# Altium PCB ESC.PcbDoc (part 1 of 3)
Units mm, origin at the board's own origin, x right, y up, seen from the top; angles counter-clockwise.
Board outline 85 x 45 mm, 4 copper layers (L1-SIGNAL/PWR, L2-PWR, L3-GND, L4-SIGNAL/PWR), stack 1.571 mm thick; 139 components, 88 nets, 499 pads, 911 vias.
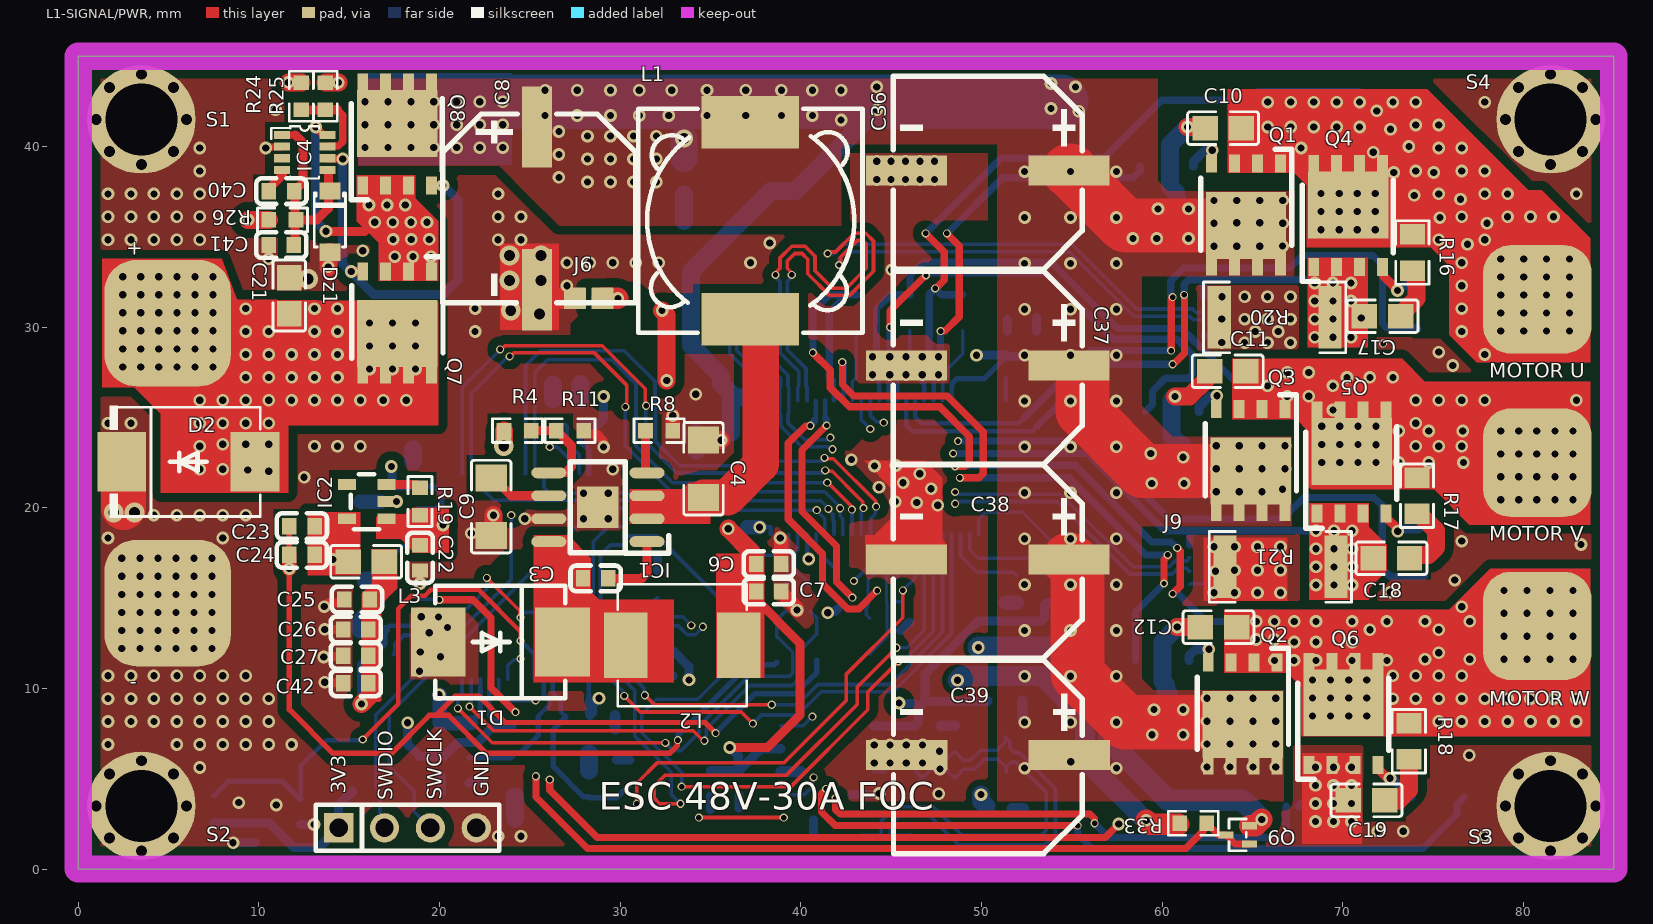
[diagram p0: L1-SIGNAL/PWR view]
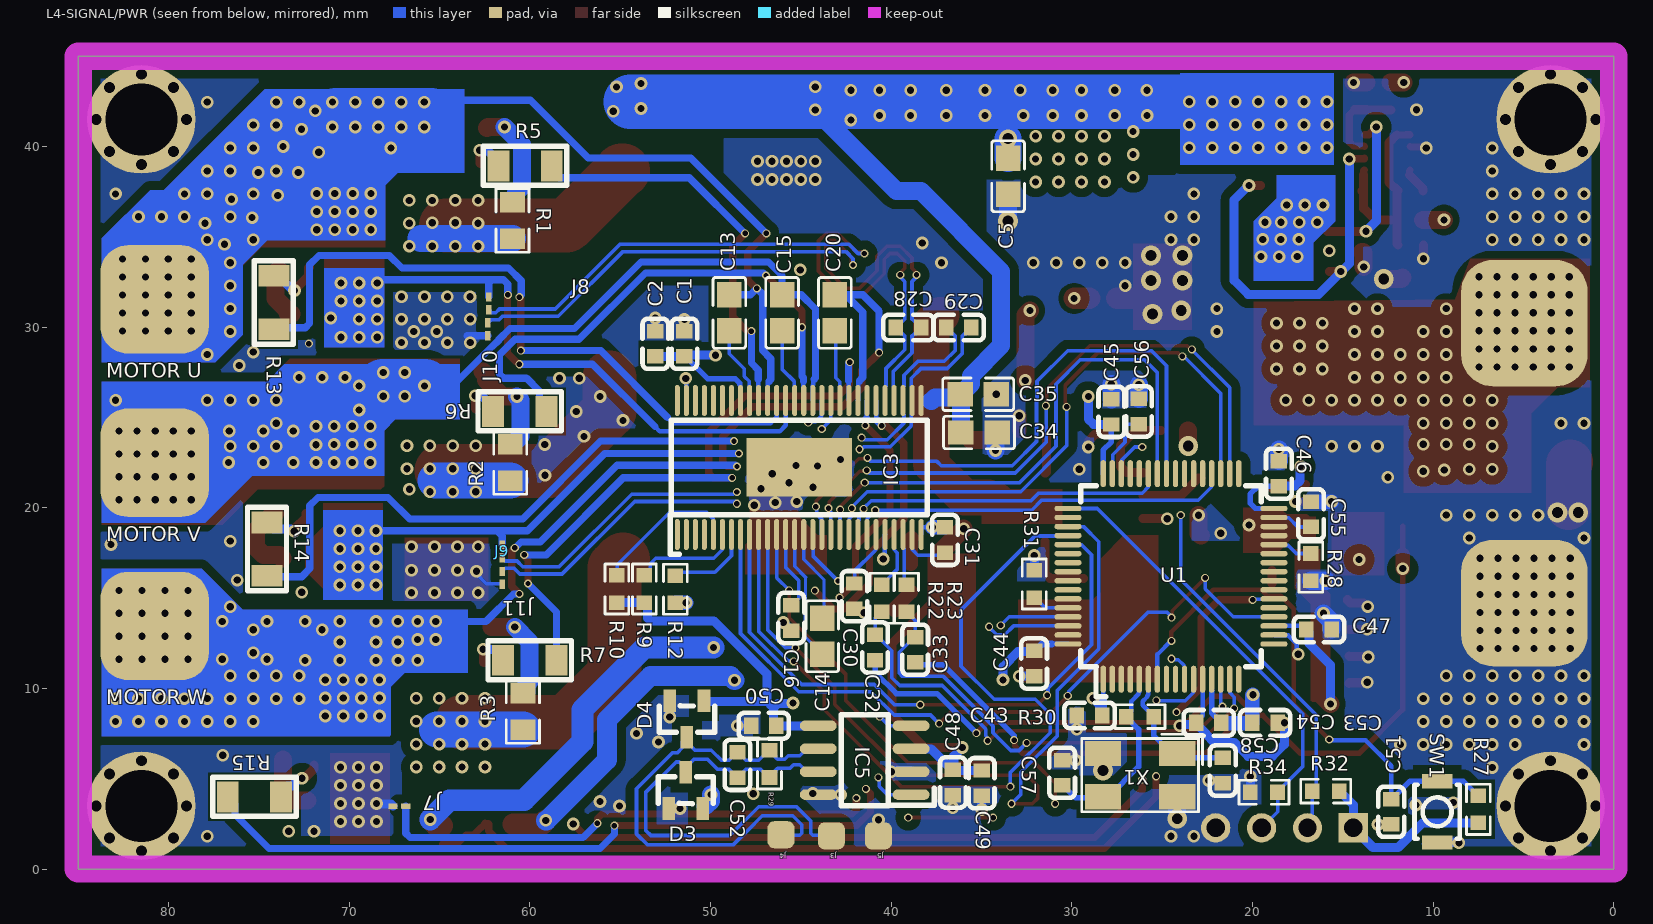
[diagram p1: L4-SIGNAL/PWR view, seen from below]
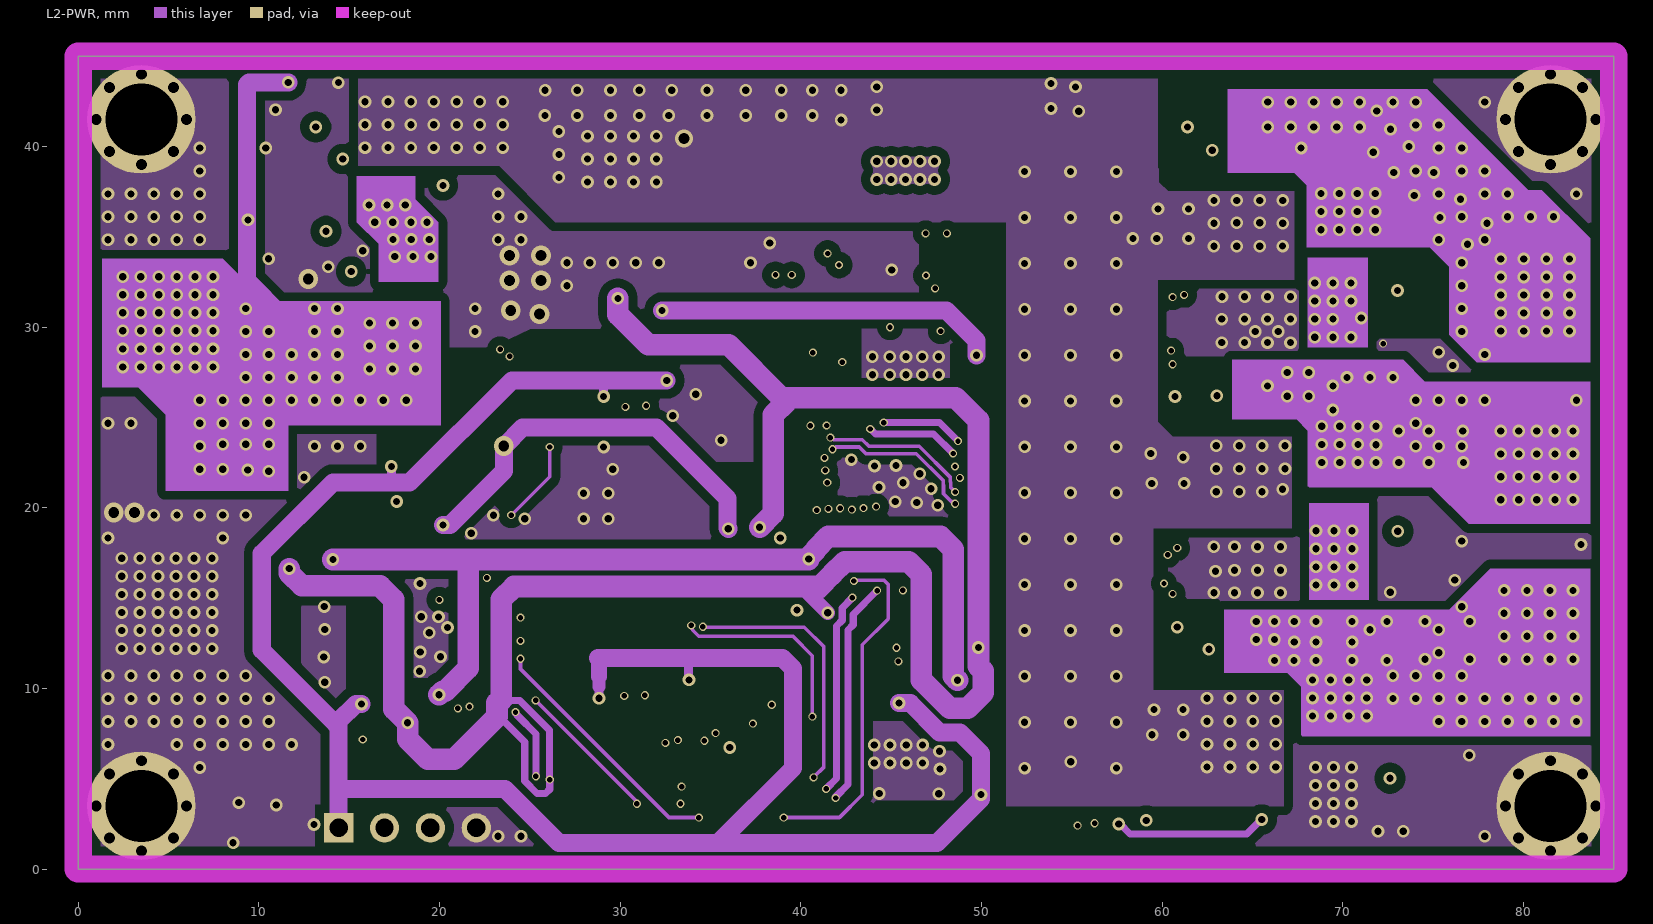
[diagram p2: L2-PWR]
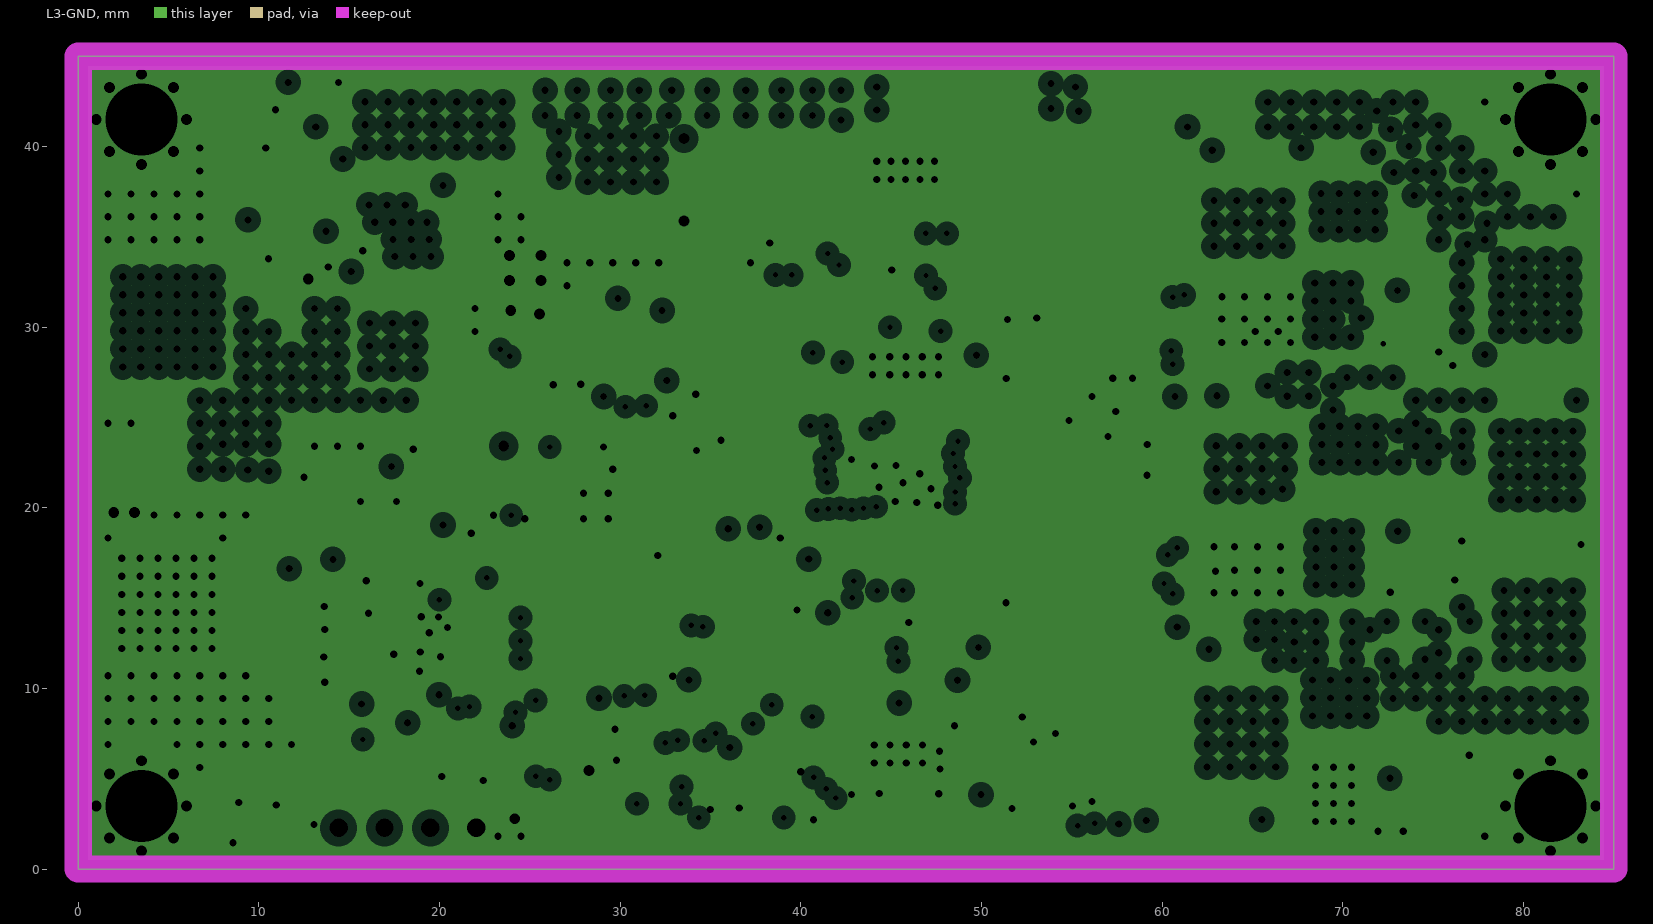
[diagram p3: L3-GND, clearances drawn from the general rule]
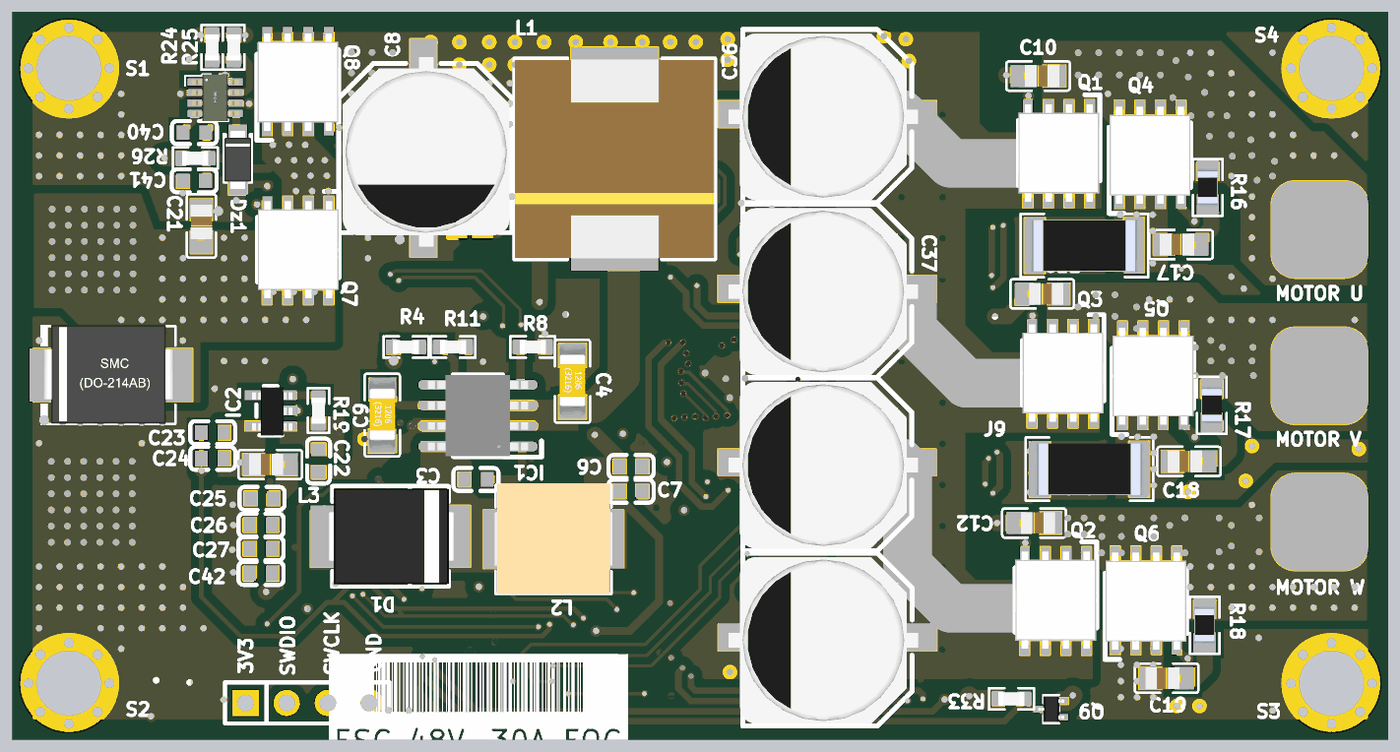
[diagram p6: 3D render of the assembled board from above, using the file's embedded part models]
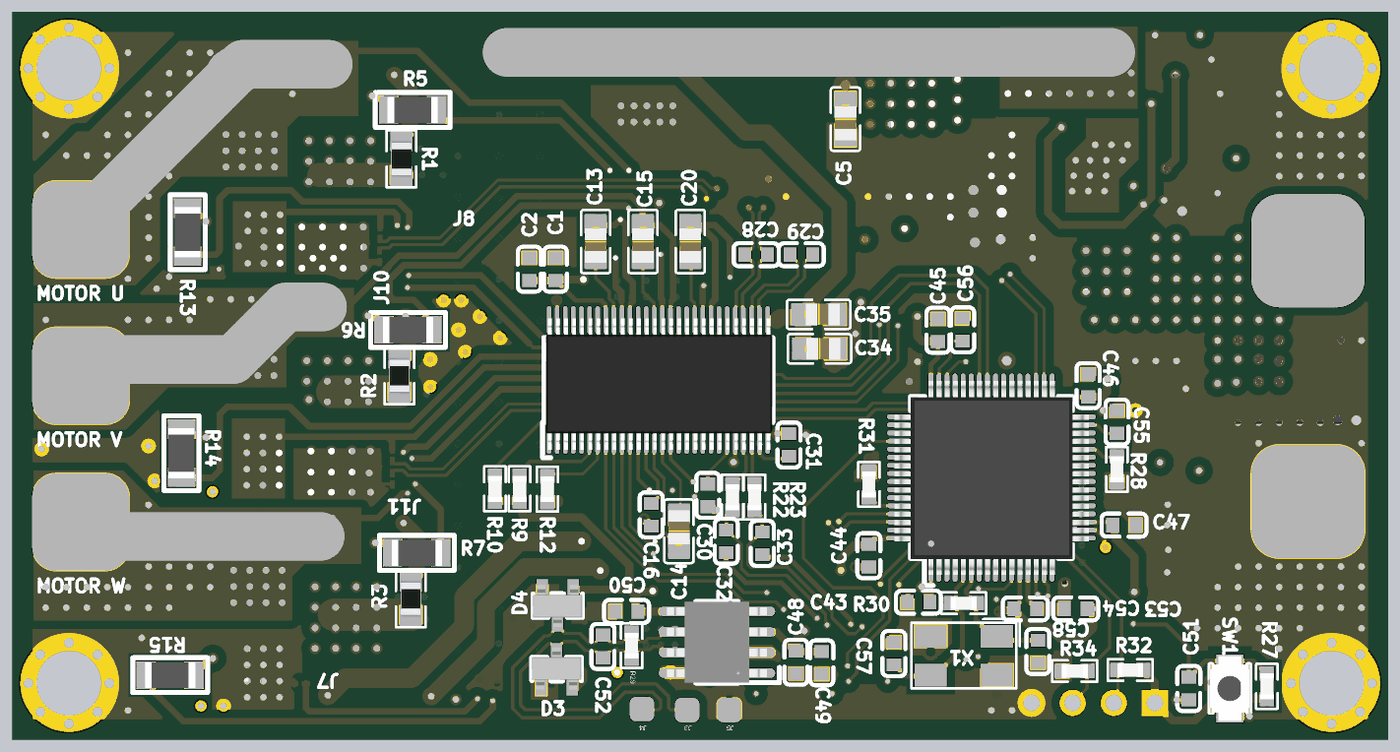
[diagram p7: 3D render of the assembled board from below, using the file's embedded part models]

## Layer stack, top to bottom
Top Solder: solder mask 0.0102, Solder Resist, Dk 3.5
L1-SIGNAL/PWR: signal copper 0.035
Dielectric 2: prepreg 0.107, 3313, Dk 4.5
Dielectric 4: prepreg 0.0935, 2116, Dk 4.1
L2-PWR: signal copper 0.07
Dielectric 1: core 0.96, Core-042, Dk 4.6
L3-GND: plane copper 0.07, net GND
Dielectric 3: prepreg 0.107, 3313, Dk 4.5
Dielectric 5: prepreg 0.0935, 2116, Dk 4.1
L4-SIGNAL/PWR: signal copper 0.035
Bottom Solder: solder mask 0.0102, Solder Resist, Dk 3.5

## Board outline
0,0 85,0 85,45 0,45

## Design rules (kind name [scope] priority, off if disabled: settings)
Clearance "Stitching POWER_IN" [IsStitchingVia and InNet('POWER_IN') vs (IsVia and (Not IsStitchingVia)) Or IsPad] p1: gap=0.127 ignorepadtopadclearanceinfootprint=FALSE
Clearance [All] p2: gap=0.2 ignorepadtopadclearanceinfootprint=TRUE except(0.5: Arc-Fill Arc-Poly Arc-Region Track-Fill Track-Poly Track-Region SMDPad-Fill SMDPad-Poly SMDPad-Region THPad-Fill THPad-Poly THPad-Region Via-Fill Via-Poly Via-Region Fill-Fill Fill-Poly Fill-Region Poly-Poly Poly-Region Region-Region)
ComponentClearance Ignore_Top_Bottom_Collision [OnTop vs OnBottom] p1: gap=0.254 collisioncheckmode=3 verticalgap=-2 showdistances=FALSE
ComponentClearance [All] p2: gap=0.254 collisioncheckmode=3 verticalgap=0.254 showdistances=FALSE
DiffPairsRouting DiffPair_S2DiffPairsRouting [InDifferentialPair ('S2')] p1: maxlimit=0.4 minlimit=0.17 mostfreqgap=0.2 toplayer_minwidth=0.17 toplayer_maxwidth=0.2 toplayer_prefwidth=0.2 midlayer1_minwidth=0.17 midlayer1_maxwidth=0.2 midlayer1_prefwidth=0.2 bottomlayer_minwidth=0.17 bottomlayer_maxwidth=0.2 bottomlayer_prefwidth=0.2 maxuncoupledlength=12.7
DiffPairsRouting DiffPair_S1DiffPairsRouting [InDifferentialPair ('S1')] p2: maxlimit=0.4 minlimit=0.17 mostfreqgap=0.2 toplayer_minwidth=0.17 toplayer_maxwidth=0.2 toplayer_prefwidth=0.2 midlayer1_minwidth=0.17 midlayer1_maxwidth=0.2 midlayer1_prefwidth=0.2 bottomlayer_minwidth=0.17 bottomlayer_maxwidth=0.2 bottomlayer_prefwidth=0.2 maxuncoupledlength=12.7
DiffPairsRouting DiffPairsRouting_1 [InDifferentialPair ('S1')] p3: maxlimit=0.254 minlimit=0.254 mostfreqgap=0.254 toplayer_minwidth=0.381 toplayer_maxwidth=0.381 toplayer_prefwidth=0.381 midlayer1_minwidth=0.381 midlayer1_maxwidth=0.381 midlayer1_prefwidth=0.381 bottomlayer_minwidth=0.381 bottomlayer_maxwidth=0.381 bottomlayer_prefwidth=0.381 maxuncoupledlength=12.7
DiffPairsRouting DiffPair_DIFFDiffPairsRouting [InDifferentialPair ('CAN')] p4: maxlimit=0.4 minlimit=0.3 mostfreqgap=0.3 toplayer_minwidth=0.2 toplayer_maxwidth=0.4 toplayer_prefwidth=0.2 midlayer1_minwidth=0.2 midlayer1_maxwidth=0.4 midlayer1_prefwidth=0.2 bottomlayer_minwidth=0.2 bottomlayer_maxwidth=0.4 bottomlayer_prefwidth=0.2 maxuncoupledlength=12.7
DiffPairsRouting [All] p5: maxlimit=0.254 minlimit=0.254 mostfreqgap=0.254 toplayer_minwidth=0.381 toplayer_maxwidth=0.381 toplayer_prefwidth=0.381 midlayer1_minwidth=0.381 midlayer1_maxwidth=0.381 midlayer1_prefwidth=0.381 bottomlayer_minwidth=0.381 bottomlayer_maxwidth=0.381 bottomlayer_prefwidth=0.381 maxuncoupledlength=12.7
HoleSize [All] p1: absolutevalues=TRUE maxlimit=5 minlimit=0.025 maxpercent=80.000 minpercent=20.000
HoleToHoleClearance [All] p1: gap=0.2 allowstackedmicrovias=TRUE
MatchedLengths DiffPair_S2MatchedLengths [InDifferentialPair ('S2')] p1: tolerance=10 checknetsindiffpair=TRUE checkdiffpairvsdiffpair=FALSE checkxsignals=FALSE checkothers=FALSE
MatchedLengths DiffPair_S1MatchedLengths [InDifferentialPair ('S1')] p2: tolerance=10 checknetsindiffpair=TRUE checkdiffpairvsdiffpair=FALSE checkxsignals=FALSE checkothers=FALSE
MatchedLengths [InDifferentialPair ('S1')] p3: tolerance=25.4 checknetsindiffpair=FALSE checkdiffpairvsdiffpair=TRUE checkxsignals=TRUE checkothers=TRUE
MatchedLengths DiffPair_DIFFMatchedLengths [InDifferentialPair ('CAN')] p4: tolerance=5 checknetsindiffpair=TRUE checkdiffpairvsdiffpair=FALSE checkxsignals=FALSE checkothers=FALSE
MinimumSolderMaskSliver [All] p1: minsoldermaskwidth=0.1
PlaneClearance [All] p1: clearance=0.508
PlaneConnect [All] p1: pad.planeconnectstyle=Relief pad.reliefexpansion=1 pad.reliefentries=4 pad.reliefconductorwidth=1 pad.reliefairgap=1 via.planeconnectstyle=Direct via.reliefexpansion=1 via.reliefentries=4 via.reliefconductorwidth=1 via.reliefairgap=1
PolygonConnect [All] p1: connectstyle=Direct reliefconductorwidth=0.254 reliefentries=4 polygonreliefangle="90 Angle" airgapwidth=0.254
RoutingVias [All] p1: holewidth=0.4 width=0.7 viastyle="Through Hole" minholewidth=0.2 minwidth=0.4 maxholewidth=0.7 maxwidth=1.1
SilkToSilkClearance [All] p1: silktosilkclearance=0
SilkToSolderMaskClearance [IsPad] p1: minsilkscreentomaskgap=0.1 clearancetoexposedcopper=TRUE
SolderMaskExpansion [All] p1: expansion=0.102 istentingtop=FALSE
SupplyNets "Schematic Supply Nets" [InNet('GND')] p1: voltage=0.000
SupplyNets "Schematic Supply Nets_8" [InNet('AGND')] p2: voltage=0.000
SupplyNets "Schematic Supply Nets_7" [InNet('POWER_LOAD')] p3: voltage=0.000
SupplyNets "Schematic Supply Nets_6" [InNet('V_5V')] p4: voltage=0.000
SupplyNets "Schematic Supply Nets_5" [InNet('VDD_SPI')] p5: voltage=0.000
SupplyNets "Schematic Supply Nets_4" [InNet('POWER_BUCK')] p6: voltage=0.000
SupplyNets "Schematic Supply Nets_3" [InNet('POWER_IN')] p7: voltage=0.000
SupplyNets "Schematic Supply Nets_1" [InNet('A3V3')] p8: voltage=0.000
UnRoutedNet [All] p1: checkbadconnections=TRUE
Width Width_power [InNetClass('POWER')] p1: maxlimit=14 minlimit=0.2 preferedwidth=5
Width Width_signal [All] p2: maxlimit=1.5 minlimit=0.17 preferedwidth=0.3 minimp=50.000000 maximp=50.000000 favimp=50.000000
20 further rules are at their usual default settings.

## Classes and differential pairs
net class POWER: A3V3 AGND AH AL BH CH CL GH_A GH_B GH_C GL_A GL_B GL_C GND POWER_BUCK POWER_IN POWER_LOAD SH_A SH_B SH_C SL_A SL_B SL_C V_5V VDD_SPI
differential pair class DIFF: CAN S1 S2
net class TIME1: AH AL BH BL CH CL EN_GATE
net class SPI3: GND NetIC3_7 nSCS SCLK SDI SDO
net class CSAI: S1_N S1_P S2_N S2_P
component class ESC: C1 C2 C3 C4 C5 C6 C7 C8 C9 C10 C11 C12 C13 C14 C15 C16 C17 C18 C19 C20 C21 C22 C23 C24 C25 C26 C27 C28 C29 C30 C31 C32 C33 C34 C35 C36 C37 C38 C39 C40 C41 C42 C43 C44 C45 C46 C47 C48 C49 C50 C51 C52 C53 C54 C55 C56 C57 C58 D1 D2 D3 D4 Dz1 IC1 IC2 IC3 IC4 IC5 J3 J4 J5 J6 J7 J8 J9 J10 J11 L1 L2 L3 Q1 Q2 Q3 Q4 Q5 Q6 Q7 Q8 Q9 R1 R2 R3 R4 R5 R6 R7 R8 R9 R10 R11 R12 R13 R14 R15 R16 R17 R18 R19 R20 R21 R22 R23 R24 R25 R26 R27 R28 R29 R30 R31 R32 R33 R34 S1 S2 S3 S4 SW1 U1 X1
differential pair S2: +S2_P -S2_N
differential pair S1: +S1_P -S1_N
differential pair CAN: +CAN_P -CAN_N

## Components (designator, comment, footprint, x,y, rotation, side; value= is the part's Value field where it differs from the comment)
3V3 "4PIN" HDR-TH_4P-HX-PH254-01-04-Z-L11.5 18.224,2.286 r0 top (schematic designator CN1)
+ "PAD" PAD#1 -21.59,37.846 r0 top (schematic designator J1)
- "PAD" PAD#2 -32.766,20.32 r0 top (schematic designator J2)
C1 "100nF" C0603 51.446,29.083 r270 bottom
C2 "10uF" C0603 53.054,29.083 r270 bottom
C3 "100nF" C0603 28.641,16.097 r0 top
C4 "10uF" C1206 34.608,22.162 r90 top
C5 "100nF" C0805#1 33.528,38.354 r90 bottom
C6 "47uF" C0603 38.227,16.891 r180 top
C7 "47uF" C0603 38.227,15.367 r180 top
C8 "100uF" CAP-SMD_BD10.0-L10.3-W10.3-FD 25.4,36.576 r270 top
C9 "16nF" C1206 22.86,20.066 r90 top
C10 "10nF" C0805#2 63.373,41.021 r180 top
C11 "10nF" C0805#2 63.627,27.559 r180 top
C12 "10nF" C0805#2 63.119,13.399 r180 top
C13 "100nF" C0805#1 48.959,30.794 r90 bottom
C14 "220nF" C0805#1 43.815,12.89 r270 bottom
C15 "100nF" C0805#1 46.038,30.794 r90 bottom
C16 "2.2uF" C0603 45.529,13.906 r90 bottom
C17 "10nF" C0805#2 72.2,30.607 r0 top
C18 "10nF" C0805#2 72.692,17.209 r0 top
C19 "10nF" C0805#2 71.31,3.81 r0 top
C20 "100nF" C0805#1 43.116,30.794 r90 bottom
C21 "100nF" C0805#2 11.684,31.75 r270 top
C22 "10uF" C0603 18.92,17.232 r90 top
C23 "10uF" C0603 12.383,18.986 r0 top
C24 "100nF" C0603 12.383,17.399 r0 top
C25 "10uF" C0603 15.43,14.922 r0 top
C26 "1uF" C0603 15.367,13.271 r0 top
C27 "100nF" C0603 15.367,11.811 r0 top
C28 "1nF" C0603 39.047,29.978 r0 bottom
C29 "1nF" C0603 36.26,29.978 r0 bottom
C30 "1uF" C0603 42.037,15.113 r90 bottom
C31 "1uF" C0603 37.02,18.224 r90 bottom
C32 "2.2uF" C0603 40.891,12.272 r90 bottom
C33 "2.2uF" C0603 38.669,12.145 r90 bottom
C34 "100nF" C0805#1 35.138,24.168 r0 bottom
C35 "4.7uF" C0805#1 35.183,26.289 r0 bottom
C36 "100uF" CAP-SMD_BD10.0-L10.3-W10.3-FD 50.347,38.672 r180 top
C37 "100uF" CAP-SMD_BD10.0-L10.3-W10.3-FD 50.347,27.877 r180 top
C38 "100uF" CAP-SMD_BD10.0-L10.3-W10.3-FD 50.347,17.145 r180 top
C39 "100uF" CAP-SMD_BD10.0-L10.3-W10.3-FD 50.357,6.322 r180 top
C40 "220nF" C0603 11.248,37.529 r0 top
C41 "1uF" C0603 11.239,34.544 r0 top
C42 "10uF" C0603 15.367,10.287 r0 top
C43 "1uF" C0603 29.019,8.509 r180 bottom
C44 "100nF" C0603 32.085,11.383 r90 bottom
C45 "100nF" C0603 27.812,25.312 r270 bottom
C46 "100nF" C0603 18.542,21.891 r270 bottom
C47 "100nF" C0603 16.319,13.271 r0 bottom
C48 "10uF" C0603 36.586,4.801 r90 bottom
C49 "100nF" C0603 34.989,4.763 r90 bottom
C50 "100nF" C0603 47.053,7.938 r180 bottom
C51 "100nF" C0603 12.319,3.175 r270 bottom
C52 "100pF" C0603 48.511,5.771 r270 bottom
C53 "1uF" C0603 19.304,8.099 r0 bottom
C54 "100nF" C0603 22.417,8.099 r180 bottom
C55 "2.2uF" C0603 16.757,19.643 r270 bottom
C56 "2.2uF" C0603 26.289,25.336 r270 bottom
C57 "18pF" C0603 30.535,5.334 r270 bottom
C58 "18pF" C0603 21.645,5.461 r270 bottom
D1 "DIODE SCHOTTKY 100V DO-214AB" SMC_L7.1-W6.2-LS8.1-RD 23.368,12.573 r180 top
D2 "93.6V 1.5kW@10/1000us Unidirectional 58V SMC TVS Diodes RoHS" SMC_L6.9-W5.9-LS7.9-RD 6.096,22.543 r0 top
D3 "DIODE ARR SCHOTTKY 30V SOT-23" SOT-23-3_L2.9-W1.3-P1.90-LS2.4-BR 51.37,4.36 r180 bottom
D4 "DIODE ARR SCHOTTKY 30V SOT-23" SOT-23-3_L2.9-W1.3-P1.90-LS2.4-BR 51.309,8.313 r0 bottom
Dz1 "DIODE ZENER 56V 500mW SOD-123W" SOD-123_L2.8-W1.8-LS3.7-RD 13.932,35.844 r270 top
IC1 "60V 3A Step-Down Converter" SOIC-8_L4.9-W3.9-P1.27-LS6.0-BL-EP2.3 28.768,20.034 r90 top
IC2 "500mA Low-Noise LDo Voltage Regulator" SOT-23-5_L2.9-W1.6-P0.95-LS2.8-BR 15.967,20.349 r90 top
IC3 "DRV8301 Three-Phase Gate Driver With Dual Current Shunt Amplifiers and Buck Regulator" HTSSOP-56_L14.0-W6.0-P0.50-LS8.1-BL-EP 45.089,22.236 r180 bottom
IC4 "TSOT-23-8 OR Controllers, Ideal Diodes RoHS" SOT-23-8_L2.9-W1.6-P0.65-LS2.8-BL 12.535,39.674 r270 top
IC5 "High-speed CAN transceiver" SOIC-8_L4.9-W3.9-P1.27-LS6.0-BL 41.465,6.032 r90 bottom
J3 "PAD" PAD#3 43.307,1.841 r180 bottom
J4 "PAD" PAD#3 46.101,1.905 r180 bottom
J5 "PAD" PAD#3 40.703,1.841 r180 bottom
J6 "2 way net tie junction" 2way_MP 28.258,31.594 r0 top net-tie
J7 "2 way net tie junction" 2way_LP 67.221,3.492 r0 bottom net-tie
J8 "2 way net tie junction" 2way_LP 62.275,31.317 r90 bottom net-tie
J9 "2 way net tie junction" 2way_LP 61.531,17.59 r90 bottom net-tie
J10 "2 way net tie junction" 2way_LP 62.323,29.887 r270 bottom net-tie
J11 "2 way net tie junction" 2way_LP 61.531,16.129 r270 bottom net-tie
L1 "47uH" IND-SMD_L12.3-W12.3 37.211,35.9 r270 top
L2 "8.2uH" IND-SMD_L7.0-W6.6_FXL0630 34.544,13.462 r180 top
L3 "220Ω" C0805#2 15.938,17.018 r0 top
"MOTOR U" "PAD" PAD#4 80.772,33.782 r90 bottom
"MOTOR U" "PAD" PAD#4 80.772,33.782 r90 top (schematic designator MOTOR_U1)
"MOTOR V" "PAD" PAD#4 80.772,24.744 r90 bottom
"MOTOR V" "PAD" PAD#5 80.772,22.5 r90 top (schematic designator MOTOR_V1)
"MOTOR W" "PAD" PAD#4 80.772,15.706 r90 bottom
"MOTOR W" "PAD" PAD#5 80.772,13.462 r90 top (schematic designator MOTOR_W1)
Q1 "MOSFET N-CH 80V 100A SOP-8-Advance" SOP-8_L5.0-W5.0-P1.27-LS6.0_TPH4R008NH-L1Q 64.643,36.258 r180 top
Q2 "MOSFET N-CH 80V 100A SOP-8-Advance" SOP-8_L5.0-W5.0-P1.27-LS6.0_TPH4R008NH-L1Q 64.453,8.636 r180 top
Q3 "MOSFET N-CH 80V 100A SOP-8-Advance" SOP-8_L5.0-W5.0-P1.27-LS6.0_TPH4R008NH-L1Q 64.897,22.669 r180 top
Q4 "MOSFET N-CH 80V 100A SOP-8-Advance" SOP-8_L5.0-W5.0-P1.27-LS6.0_TPH4R008NH-L1Q 70.294,36.131 r0 top
Q5 "MOSFET N-CH 80V 100A SOP-8-Advance" SOP-8_L5.0-W5.0-P1.27-LS6.0_TPH4R008NH-L1Q 70.485,22.479 r0 top
Q6 "MOSFET N-CH 80V 100A SOP-8-Advance" SOP-8_L5.0-W5.0-P1.27-LS6.0_TPH4R008NH-L1Q 70.04,8.572 r0 top
Q7 "MOSFET N-CH 80V 100A SOP-8-Advance" SOP-8_L5.0-W5.0-P1.27-LS6.0_TPH4R008NH-L1Q 17.653,30.29 r180 top
Q8 "MOSFET N-CH 80V 100A SOP-8-Advance" SOP-8_L5.0-W5.0-P1.27-LS6.0_TPH4R008NH-L1Q 17.653,40.646 r0 top
Q9 "TRANS NPN 40V 200mA SOT-416" SC-75-3_L1.6-W0.8-P1.00-LS1.6-BR 64.184,1.897 r90 top
R1 "10Ω" R0805 60.96,36.195 r270 bottom
R2 "10Ω" R0805 61.087,22.796 r270 bottom
R3 "10Ω" R0805 60.389,9.017 r270 bottom
R4 "100kΩ" R0603 24.32,24.272 r180 top
R5 "8.06Ω" R1206 60.262,38.925 r0 bottom
R6 "8.06Ω" R1206 60.561,25.336 r0 bottom
R7 "8.06Ω" R1206 60.008,11.557 r0 bottom
R8 "49.9kΩ" R0603 32.156,24.277 r180 top
R9 "10kΩ" R0603 53.658,15.509 r270 bottom
R10 "10kΩ" R0603 55.182,15.509 r90 bottom
R11 "17.8kΩ" R0603 27.224,24.272 r0 top
R12 "24.9KΩ" R0603 51.943,15.494 r90 bottom
R13 "8.06Ω" R1206 74.168,31.369 r90 bottom
R14 "8.06Ω" R1206 74.549,17.716 r90 bottom
R15 "8.06Ω" R1206 75.248,4 r180 bottom
R16 "10Ω" R0805 73.85,33.846 r90 top
R17 "10Ω" R0805 74.105,20.383 r90 top
R18 "10Ω" R0805 73.66,6.794 r90 top
R19 "10kΩ" R0603 18.92,20.349 r270 top
R20 "3.3mΩ" R2512 66.23,30.543 r0 top
R21 "3.3mΩ" R2512 66.548,16.732 r0 top
R22 "56Ω" R0603 40.513,14.995 r270 bottom
R23 "56Ω" R0603 39.15,14.995 r270 bottom
R24 "100kΩ" R0603 12.345,42.787 r90 top
R25 "2.67kΩ" R0603 13.678,42.787 r270 top
R26 "10kΩ" R0603 11.303,35.941 r180 top
R27 "10kΩ" R0603 7.493,3.311 r270 bottom
R28 "10kΩ" R0603 16.764,16.719 r270 bottom
R29 "120Ω" R0603 46.737,5.826 r270 bottom
R30 "1MΩ" R0603 26.226,8.445 r0 bottom
R31 "10kΩ" R0603 32.078,15.786 r270 bottom
R32 "10kΩ" R0603 15.938,4.318 r180 bottom
R33 "33kΩ" R0603 61.722,2.54 r180 top
R34 "10kΩ" R0603 19.367,4.255 r180 bottom
S1 "Screw" "Screw Hole 4mm" 3.5,41.5 r0 top
S2 "Screw" "Screw Hole 4mm" 3.5,3.5 r0 top
S3 "Screw" "Screw Hole 4mm" 81.5,3.5 r0 top
S4 "Screw" "Screw Hole 4mm" 81.5,41.5 r0 top
SW1 "B3U-1000P" KEY-SMD_B3U-1000PM 9.779,3.175 r270 bottom
U1 "ARM Cortex-M4 32b MCU+FPU, 210DMIPS, up to 1MB Flash/192+4KB RAM, USB OTG HS/FS, Ethernet, 17 TIMs, 3 ADCs, 15 comm. interfaces & camera" LQFP-64_L10.0-W10.0-P0.50-LS12.0-BL 24.511,16.192 r180 bottom
X1 "8MHz" OSC-SMD_4P-L5.0-W3.2-BL 26.217,5.207 r0 bottom

## Footprints (in the part's own frame and the unit in brackets; to place one, negate y for a bottom-side part, rotate by r counter-clockwise, add the part's x,y. Pads: shape width x height; smd on the part's side, far side on the other; paste and mask are expansions set on the pad)
2way_LP [mil] "2 way low power net tie junction"
  rrect5% 20x12 smd paste-100 mask+4: 1(-14,0) 2(14,0)
2way_MP [mm] "2 way medium power net tie junction"
  rrect5% 1.2x1.2 smd paste-2.54: 1(-0.762,0) 2(0.762,0)
C0603 [mm] "cap 0603"
  rect 0.8x0.9 smd paste+0 mask+0.051: 1(-0.7,0) 2(0.7,0)
  silkscreen extent -1.39,-0.71 1.39,0.71, body extent -0.81,-0.4 0.79,0.4, height 0.8
C0805#1 [mm]
  rect 1.41x1.35 smd paste-100 mask+0.051: 1(-1,0) 2(1,0)
  silkscreen extent -1.96,-0.9 1.96,0.9, body extent -1.3,-0.67 0.8,0.67, height 0.71
C0805#2 [mm]
  rect 1.41x1.35 smd paste-100 mask+0.05: 1(-1,0)
  rect 1.41x1.35 smd paste-100 mask+0.051: 2(1,0)
  silkscreen extent -1.96,-0.9 1.96,0.9, body extent -1.3,-0.67 0.8,0.67, height 0.71
C1206 [mm] "1206"
  rect 1.485x1.728 smd paste-100 mask+0.051: 1(-1.593,0) 2(1.593,0)
  silkscreen extent -2.56,-1.09 2.56,1.09, body extent -2.22,-0.8 2.32,0.8, height 1.25
CAP-SMD_BD10.0-L10.3-W10.3-FD [mm] "SMD,D10xL12.5mm"
  rect 4.5x1.65 smd paste+0 mask+0.051: 1(-4.5,0) 2(4.5,0)
  silkscreen extent -5.23,-5.23 5.23,5.47, body extent -5.6,-4.98 6.1,5.32, height 10.3
HDR-TH_4P-HX-PH254-01-04-Z-L11.5 [mm] "Through Hole,P=2.54mm"
  rect 1.62x1.62 hole 1.02 paste-2539.97 mask+0.051: 1(-3.81,0)
  round 1.62 hole 1.02 paste-2539.97 mask+0.051: 2(-1.27,0) 3(1.27,0) 4(3.81,0)
  silkscreen extent -5.08,-1.27 5.08,1.27
HTSSOP-56_L14.0-W6.0-P0.50-LS8.1-BL-EP [mm] "HTSSOP-56-EP-6mm"
  oval 0.28x1.715 smd paste+0 mask+0.051: 1(-6.75,-3.708) 2(-6.25,-3.708) 3(-5.75,-3.708) 4(-5.25,-3.708) 5(-4.75,-3.708) 6(-4.25,-3.708) 7(-3.75,-3.708) 8(-3.25,-3.708) 9(-2.75,-3.708) 10(-2.25,-3.708) 11(-1.75,-3.708) 12(-1.25,-3.708) 13(-0.75,-3.708) 14(-0.25,-3.708) 15(0.25,-3.708) 16(0.75,-3.708) 17(1.25,-3.708) 18(1.75,-3.708) 19(2.25,-3.708) 20(2.75,-3.708) 21(3.25,-3.708) 22(3.75,-3.708) 23(4.25,-3.708) 24(4.75,-3.708) 25(5.25,-3.708) 26(5.75,-3.708) 27(6.25,-3.708) 28(6.75,-3.708) 29(6.75,3.708) 30(6.25,3.708) 31(5.75,3.708) 32(5.25,3.708) 33(4.75,3.708) 34(4.25,3.708) 35(3.75,3.708) 36(3.25,3.708) 37(2.75,3.708) 38(2.25,3.708) 39(1.75,3.708) 40(1.25,3.708) 41(0.75,3.708) 42(0.25,3.708) 43(-0.25,3.708) 44(-0.75,3.708) 45(-1.25,3.708) 46(-1.75,3.708) 47(-2.25,3.708) 48(-2.75,3.708) 49(-3.25,3.708) 50(-3.75,3.708) 51(-4.25,3.708) 52(-4.75,3.708) 53(-5.25,3.708) 54(-5.75,3.708) 55(-6.25,3.708) 56(-6.75,3.708)
  rect 5.825x3.235 smd paste+0 mask+0.051: 57(0,0)
  silkscreen extent -7.15,-4.8 7.08,2.62, body extent -6.95,-4.3 7.05,3.8, height 1.13
IND-SMD_L7.0-W6.6_FXL0630 [mm] "SMD,7x6.6mm"
  rect 2.424x3.62 smd paste+0 mask+0.051: 1(4.236,1.067) 2(-2.02,1.067)
  silkscreen extent -2.47,-2.31 4.68,4.44, body extent -2.54,-2.37 4.75,4.44, height 3
IND-SMD_L12.3-W12.3 [mm] "SMD,12.3x12.3mm"
  rect 2.9x5.4 smd paste+0 mask+0.051: 1(-5.45,0) 2(5.45,0)
  silkscreen extent -6.2,-6.2 6.2,6.2, body extent -6.15,-6.15 6.15,6.15, height 8
KEY-SMD_B3U-1000PM [mm]
  rect 0.8x1.7 smd paste+0 mask+0.051: 1(-1.7,0) 2(1.7,0)
  silkscreen extent -1.5,-1.25 1.5,1.25, body extent -2,-1.25 2,1.25, height 1.75
LQFP-64_L10.0-W10.0-P0.50-LS12.0-BL [mm] "LQFP-64(10x10)"
  oval 0.3x1.5 smd paste+0 mask+0.051: 1(-3.75,-5.678) 2(-3.25,-5.678) 3(-2.75,-5.678) 4(-2.25,-5.678) 5(-1.75,-5.678) 6(-1.25,-5.678) 7(-0.75,-5.678) 8(-0.25,-5.678) 9(0.25,-5.678) 10(0.75,-5.678) 11(1.25,-5.678) 12(1.75,-5.678) 13(2.25,-5.678) 14(2.75,-5.678) 15(3.25,-5.678) 16(3.75,-5.678) 33(3.75,5.698) 34(3.25,5.698) 35(2.75,5.698) 36(2.25,5.698) 37(1.75,5.698) 38(1.25,5.698) 39(0.75,5.698) 40(0.25,5.698) 41(-0.25,5.698) 42(-0.75,5.698) 43(-1.25,5.698) 44(-1.75,5.698) 45(-2.25,5.698) 46(-2.75,5.698) 47(-3.25,5.698) 48(-3.75,5.698)
  oval 1.5x0.3 smd paste+0 mask+0.051: 17(5.7,-3.728) 18(5.7,-3.228) 19(5.7,-2.728) 20(5.7,-2.228) 21(5.7,-1.728) 22(5.7,-1.228) 23(5.7,-0.728) 24(5.7,-0.228) 25(5.7,0.272) 26(5.7,0.772) 27(5.7,1.272) 28(5.7,1.772) 29(5.7,2.272) 30(5.7,2.772) 31(5.7,3.272) 32(5.7,3.772) 49(-5.7,3.772) 50(-5.7,3.272) 51(-5.7,2.772) 52(-5.7,2.272) 53(-5.7,1.772) 54(-5.7,1.272) 55(-5.7,0.772) 56(-5.7,0.272) 57(-5.7,-0.228) 58(-5.7,-0.728) 59(-5.7,-1.228) 60(-5.7,-1.728) 61(-5.7,-2.228) 62(-5.7,-2.728) 63(-5.7,-3.228) 64(-5.7,-3.728)
  silkscreen extent -5,-6.65 5,5.02, body extent -5.98,-6.01 6.02,5.99, height 1.6
OSC-SMD_4P-L5.0-W3.2-BL [mm]
  rect 2x1.4 smd paste+0 mask+0.051: 1(-2.05,-1.2) 2(2.05,-1.2) 3(2.05,1.2) 4(-2.05,1.2)
  silkscreen extent -3.46,-2.26 3.24,2.03, body extent -2.63,-1.68 2.47,1.62, height 1.1
PAD#1 [mm]
  rrect50% 7x7 smd mask+0.05: 1(26.543,-7.62)
PAD#2 [mm]
  rrect50% 7x7 smd mask+0.05: 1(37.719,-5.588)
PAD#3 [mm]
  rrect50% 1.5x1.5 smd mask+0.05: 1(0,0)
PAD#4 [mm]
  rrect50% 6x6 smd mask+0.05: 1(-2.244,0)
PAD#5 [mm]
  rrect50% 6x6 smd mask+0.05: 1(0,0)
R0603 [mm] "Resister pakage 0603"
  rect 0.806x0.864 smd paste-100 mask+0.051: 1(-0.753,0) 2(0.753,0)
  silkscreen extent -1.39,-0.66 1.39,0.66, body extent -0.8,-0.43 0.8,0.43, height 0.48
R0805 [mm] "0805"
  rect 1.133x1.377 smd paste-100 mask+0.051: 1(-0.712,0) 2(1.288,0)
  silkscreen extent -1.47,-0.92 2.05,0.92, body extent -0.9,-0.62 1.5,0.63, height 0.55
R1206 [mm] "package 1206"
  rect 1.208x1.701 smd paste-100 mask+0.051: 1(-1.479,0) 2(1.479,0)
  silkscreen extent -2.31,-1.08 2.31,1.08, body extent -1.55,-0.8 1.55,0.8, height 0.65
R2512 [mm] "R2512"
  rect 1.283x3.456 smd paste-100 mask+0.051: 1(-3.066,0) 2(3.066,0)
  silkscreen extent -3.94,-1.96 3.94,1.96, body extent -3.35,-1.6 3.35,1.6, height 0.55
SC-75-3_L1.6-W0.8-P1.00-LS1.6-BR [mm] "SOT-416"
  rect 0.4x0.816 smd paste+0 mask+0.051: 1(-0.5,-0.65) 2(0.5,-0.65) 3(0,0.65)
  silkscreen extent -0.88,-0.48 0.88,0.48, body extent -0.8,-0.8 0.8,0.8, height 0.78
"Screw Hole 4mm" [mm]
  round 0.6 hole 0.6: 1(-2.5,0) 1(-1.768,-1.768) 1(-1.768,1.768) 1(0,-2.5) 1(0,2.5) 1(1.768,-1.768) 1(1.768,1.768) 1(2.5,0)
  round 6 hole 4: 1(0,0)
SMC_L6.9-W5.9-LS7.9-RD [mm] "SMC(DO-214AB)"
  rect 2.7x3.3 smd paste+0 mask+0.051: 1(-3.686,0) 2(3.686,0)
  silkscreen extent -4.36,-3.1 3.98,3.1, body extent -4.22,-3 3.92,3.1, height 2.4
SMC_L7.1-W6.2-LS8.1-RD [mm] "DO-214AB"
  rect 3.03x3.82 smd paste+0 mask+0.051: 1(-3.435,0) 2(3.435,0)
  silkscreen extent -3.6,-3.11 3.6,3.11, body extent -3.95,-2.95 3.85,2.95, height 2.5
SOD-123_L2.8-W1.8-LS3.7-RD [mm] "SOD-123"
  rect 0.95x1.15 smd paste+0 mask+0.051: 1(-1.693,0) 2(1.693,0)
  silkscreen extent -1.58,-0.87 1.41,0.87, body extent -1.8,-0.82 1.8,0.83, height 0.95
SOIC-8_L4.9-W3.9-P1.27-LS6.0-BL [mm] "SOIC-8-150mil"
  oval 0.588x2.045 smd paste+0 mask+0.051: 1(-1.905,-2.57) 2(-0.635,-2.57) 3(0.635,-2.57) 4(1.905,-2.57) 5(1.905,2.57) 6(0.635,2.57) 7(-0.635,2.57) 8(-1.905,2.57)
  silkscreen extent -2.53,-3.85 2.53,1.3, body extent -2.5,-3.1 2.5,3.1, height 1.76
SOIC-8_L4.9-W3.9-P1.27-LS6.0-BL-EP2.3 [mm]
  oval 0.602x1.941 smd paste+0 mask+0.05: 1(-1.905,-2.72) 2(-0.635,-2.72) 3(0.635,-2.72) 4(1.905,-2.72) 5(1.905,2.72) 6(0.635,2.72) 7(-0.635,2.72) 8(-1.905,2.72)
  rect 2.29x2.29 smd paste+0 mask+0.05: 9(0,0)
  silkscreen extent -2.55,-3.93 2.53,1.52, body extent -2.5,-3.1 2.5,3.1, height 1.76
SOP-8_L5.0-W5.0-P1.27-LS6.0_TPH4R008NH-L1Q [mm] "SOP-8-Advance"
  rect 0.6x1 smd paste-100 mask+0.051: 1(-1.905,-2.8) 2(-0.635,-2.8) 3(0.635,-2.8) 4(1.905,-2.8)
  rect 0.6x1.2 smd paste-100 mask+0.051: 5(1.905,2.8) 6(0.635,2.8) 7(-0.635,2.8) 8(-1.905,2.8)
  rect 4.45x3.7 smd paste-100 mask+0.051: 9(0,0.635)
  silkscreen extent -2.54,-3.6 2.5,2, body extent -2.66,-3 2.64,3, height 0.95
SOT-23-3_L2.9-W1.3-P1.90-LS2.4-BR [mm] "DIODE ARR SCHOTTKY 30V SOT-23"
  rect 0.7x1.25 smd paste+0 mask+0.051: 1(-0.95,-1) 2(0.95,-1) 3(0,1)
  silkscreen extent -1.53,-0.73 1.52,0.74, body extent -1.52,-1.25 1.52,1.35, height 1.2
SOT-23-5_L2.9-W1.6-P0.95-LS2.8-BR [mm] "SOT-23-5"
  rect 0.6x1 smd paste+0 mask+0.05: 1(-0.95,-1.1) 2(0,-1.1) 3(0.95,-1.1) 4(0.95,1.1) 5(-0.95,1.1)
  silkscreen extent -1.52,-0.7 1.51,0.89, body extent -1.55,-1.35 1.45,1.15, height 1.1
SOT-23-8_L2.9-W1.6-P0.65-LS2.8-BL [mm] "TSOT-23-8"
  rect 0.45x0.9 smd paste+0 mask+0.051: 1(-0.975,-1.26) 2(-0.325,-1.26) 3(0.325,-1.26) 4(0.975,-1.26) 5(0.975,1.26) 6(0.325,1.26) 7(-0.325,1.26) 8(-0.975,1.26)
  silkscreen extent -1.45,-1.85 1.45,0.8, body extent -1.45,-1.48 1.45,1.48, height 1.1

## Part data
3V3: library part "HX PH254-01-04-Z-L11.5 STRAIGHT PIN HEADER", "Pin Header 1 2.5mm 6mm -40℃~+105℃ 3mm 4P 2.54mm 3A 1kV 1x4P Through Hole,P=2.54mm Headers, Male Pins RoHS"
C1 C3 C24 C27 C44 C45 C46 C47 C49 C50 C51 C54: library part CC0603KRX7R9BB104, "100nF ±10% 50V Ceramic Capacitor X7R 0603"
C2 C22 C23 C25 C42 C48: library part CL10A106KP8NNNC, "10uF ±10% 10V Ceramic Capacitor X5R 0603"
C4: library part C3216X6S2A106KT0A0E, "10uF X6S ±10% 100V 1206 Ceramic Capacitors RoHS"
C5 C13 C15 C20 C21 C34: library part CL21B104KCFNNNE, "100nF ±10% 100V Ceramic Capacitor X7R 0805"
C6 C7: library part GRM21BR61A476ME15L_1, "47uF ±20% 10V Ceramic Capacitor X5R 0805"
C8 C36 C37 C38 C39: library part EFVH100ADA101M10C0, "100uF ±20% 100V Aluminum Electrolytic Capacitors"
C9: library part GRM3195C1H163JA01D, "16nF ±5% 50V Ceramic Capacitor C0G 1206"
C10 C11 C12 C17 C18 C19: library part CC0805KRX7R0BB103, "10nF ±10% 100V Ceramic Capacitor X7R 0805"
C14: library part CC0805KKX7R0BB224, "220nF ±10% 100V Ceramic Capacitor X7R 0805"
C16 C32 C33 C55 C56: library part CC0603X5R25V225KN, "2.2uF X5R ±10% 25V 0603 Ceramic Capacitors RoHS"
C26 C30 C31 C43 C53: library part CL10B105KA8NNNC, "1uF ±10% 25V Ceramic Capacitor X7R 0603"
C28 C29: library part CC0603KRX7R9BB102, "1nF ±10% 50V Ceramic Capacitor X7R 0603"
C35: library part CIA0805X5R475K101MT, "4.7uF ±10% 100V Ceramic Capacitor X5R 0805"
C40: library part CGA0603X7S224K101JT, "220nF ±10% 100V Ceramic Capacitor X7S 0603"
C41: library part GRM188D72A105KE01D, "1uF ±10% 100V Ceramic Capacitor X7T 0603"
C52: library part CL10C101JB8NNNC, "100pF ±5% 50V Ceramic Capacitor C0G 0603"
C57 C58: library part CL10C180JB8NNNC, "18pF ±5% 50V Ceramic Capacitor C0G 0603"
D1: library part MBRS3100T3G, "Diode 100V 3A Surface Mount DO-214AB"
D2: library part "VISHAY SMCJ58A-E3/57T"
D3 D4: library part BAT54C_C916424, "600mA 30V 1 Pair Common Cathode 1V@100mA 200mA SOT-23 Single Diodes RoHS"
Dz1: library part BZT52C56, "Zener Diode Independent 56V 500mW Surface Mount SOD-123W"
IC1: library part LMR16030SDDAR, "2.5MHz Buck Adjustable 800mV~50V 3A 4.3V~60V SO-8-EP Voltage Regulators - DC DC Switching Regulators RoHS"
IC2: library part SPX3819M5-L-3-3, "3.3V 16V Positive Fixed SOT-23-5 Voltage Regulators - Linear, Low Drop Out (LDO) Regulators RoHS"
IC3: library part DRV8301DCA, "MOSFET 1.7A 2.3A HTSSOP-56-EP-6mm Motor Drivers, Controllers RoHS"
IC4: library part LM74502DDFR, "Low-IQ high-side switch controller with reverse polarity protection and overvoltage protection functions"
IC5: library part TJA1051T/3/1J, "4.5V~5.5V CAN FD Transceiver SOIC-8-150mil Drivers, Receivers, Transceivers RoHS"
J6 J7 J8 J9 J10 J11: library part 2way, ComponentLink1Description=Source, ComponentLink1URL=http://www.edatools.cz/addons, FootprintNote="LP=12mil, MP=40mil, HP=120mil"
L1: library part SMDRI127-470MT, "2.5A 47uH 4.6A 100mΩ Magnetic Shielded Inductor ±20% SMD,12.3x12.3mm Fixed Inductors RoHS"
L2: library part FXL0630-8R2-M, "5A 8.2uH 6A 60mΩ Molded Inductor ±20% SMD,7x6.6mm Fixed Inductors RoHS"
L3: library part BLM21PG221SN1D, "220Ω@100MHz 1 Line Ferrite Bead 0805 2A 45mΩ"
Q1 Q2 Q3 Q4 Q5 Q6 Q7 Q8: library part TPH4R008NH,L1Q(M, "N-Channel 80V 100A 78W SOP-8-Advance"
Q9: library part MMBT3904TT1G, "Bipolar (BJT) Transistor NPN 40V 200mA 300MHz 200mW Surface Mount SOT-416"
R1 R2 R3 R16 R17 R18: library part CRCW080510R0FKEAHP, "10Ω 500mW Thick Film Resistor ±100ppm/℃ ±1% 0805 Chip Resistor - Surface Mount RoHS"
R4: library part RC0603FR-07100KL, "100mW 100kΩ 75V Thick Film Resistor ±100ppm/℃ ±1% 0603 Chip Resistor - Surface Mount RoHS"
R5 R6 R7 R13 R14 R15: library part FRC1206F8R06TS, "8.06Ω ±1% 250mW 1206 Thick Film Resistor"
R8: library part RC0603FR-0749K9L, "100mW 49.9kΩ 75V Thick Film Resistor ±100ppm/℃ ±1% 0603 Chip Resistor - Surface Mount RoHS"
R9 R10 R19 R24 R25 R26 R27 R28 R31 R32 R34: library part RC0603FR-0710KL, "100mW 10kΩ 75V ±100ppm/℃ Thick Film Resistor ±1% 0603 Chip Resistor - Surface Mount ROHS"
R11: library part 0603WAF1782T5E, "17.8kΩ ±1% 100mW 0603 Thick Film Resistor"
R12: library part FRC0603F2492TS, "24.9kΩ ±1% 100mW 0603 Thick Film Resistor"
R20 R21: library part WSLP25123L300FEA, "3.3mΩ 3W Current Sense Resistor ±1% ±150ppm/℃ 2512 Chip Resistor - Surface Mount RoHS"
R22 R23: library part FRC0603F56R0TS, "56Ω ±1% 100mW 0603 Thick Film Resistor"
R29: library part 0603WAF1200T5E, "120Ω ±1% 100mW 0603 Thick Film Resistor"
R30: library part RC0603FR-071ML, "100mW 1MΩ 75V Thick Film Resistor ±100ppm/℃ ±1% 0603 Chip Resistor - Surface Mount RoHS"
R33: library part RC0603FR-0733KL, "100mW 33kΩ 75V Thick Film Resistor ±100ppm/℃ ±1% 0603 Chip Resistor - Surface Mount RoHS"
SW1: "12V 2.5mm Round Button 3mm SPST 50mA SMD,3x2.5mm Tactile Switches ROHS"
U1: library part STM32F405RGT6, "ARM Cortex-M4 32 Bit 168MHz 51 LQFP-64(10x10) Microcontrollers RoHS"
X1: library part ABM3B-8.000MHZ-10-1-U-T, "Crystal 8MHz ±10ppm 10pF 200Ω SMD5032-4P"

## Free pads (board coordinates)
  rrect50% 7x7 smd far side mask+0.05: 1(4.953,14.732) 1(4.953,30.226)

## Via types
v1: diameter 0.7, hole 0.4, L1-SIGNAL/PWR to L4-SIGNAL/PWR, tented both sides, 386 vias
v2: diameter 0.7, hole 0.4, L1-SIGNAL/PWR to L4-SIGNAL/PWR, 181 vias
v3: diameter 0.7, hole 0.4, L1-SIGNAL/PWR to L4-SIGNAL/PWR, tented bottom, 112 vias
v4: diameter 0.45, hole 0.3, L1-SIGNAL/PWR to L4-SIGNAL/PWR, tented both sides, 87 vias
v5: diameter 0.7, hole 0.4, L1-SIGNAL/PWR to L2-PWR, tented both sides, 34 vias
v6: diameter 0.7, hole 0.4, L3-GND to L4-SIGNAL/PWR, tented both sides, 30 vias
v7: diameter 0.7, hole 0.4, L1-SIGNAL/PWR to L3-GND, 27 vias
v8: diameter 0.7, hole 0.4, L1-SIGNAL/PWR to L2-PWR, 21 vias
v9: diameter 0.7, hole 0.4, L3-GND to L4-SIGNAL/PWR, 10 vias
v10: diameter 1.1, hole 0.6, L1-SIGNAL/PWR to L4-SIGNAL/PWR, tented both sides, 10 vias
v11: diameter 0.7, hole 0.4, L1-SIGNAL/PWR to L3-GND, tented both sides, 8 vias
v12: diameter 1.1, hole 0.6, L3-GND to L4-SIGNAL/PWR, tented both sides, 3 vias
v13: diameter 0.7, hole 0.4, L1-SIGNAL/PWR to L4-SIGNAL/PWR, tented top, 1 vias
v14: diameter 1, hole 0.6, L1-SIGNAL/PWR to L4-SIGNAL/PWR, tented both sides, 1 vias

## Nets (pads, with @x,y where several pads share a name; then routed paths per layer and width w, separated by ;. In a path a pad name is that pad's centre, name@x,y a point inside that pad or via, vN(x,y) a via of type N, cw(c..) or ccw(c..) an arc to the next point about the centre after c; other vN are vias at no path point)
A3V3: C23.2 C24.2 C53.2 C54.2 IC2.5 IC3.24 L3.1 R33.2 U1.13 | length 76.6
  L1-SIGNAL/PWR w0.8: C24.2@13.082,17.272 13.082,16.896 13.333,16.645 13.597,16.645 v1(14.097,17.145)
  L1-SIGNAL/PWR w1.2: v1(59.118,2.7) 59.328,2.491 R33.2@60.919,2.491
  L2-PWR w1.2: v1(14.097,17.145) 21.594,17.145 31.388,17.145 ; v1(19.973,9.656) 20.174,9.857 20.316,9.857 21.594,11.135 21.594,16.705 ; 31.388,17.144 40.421,17.144 v1(40.442,17.166) ; v1@40.322,17.144 40.826,17.648 40.826,17.712 41.529,18.415 47.727,18.415 48.43,17.712 48.43,10.697 v1(48.67,10.457)
  L4-SIGNAL/PWR w0.25: U1.13@22.261,9.879 U1.13@22.261,10.514 ; IC3.24@40.339,18.528 40.345,18.522 40.345,17.385 40.442,17.287 v1(40.442,17.166)
  L4-SIGNAL/PWR w0.3: C54.2@21.717,8.099 21.717,8.149 21.967,8.399 22.017,8.399 22.261,8.643 U1.13@22.261,9.879
  L4-SIGNAL/PWR w0.8: v1(19.973,9.656) 20.004,9.625 C53.2@20.004,8.099 ; C53.2@20.004,8.073 21.717,8.073 C54.2@21.717,8.099
  L4-SIGNAL/PWR w1.1: v1(48.67,10.457) 48.901,10.688 53.32,10.688 55.737,8.272 55.737,6.049 59.086,2.7 v1(59.118,2.7)
AGND: C23.1 C24.1 C30.1 C31.2 C32.1 C33.1 C53.1 C54.1 IC3.28 J6.2 Q9.2 U1.12 | length 267.1
  L1-SIGNAL/PWR w0.3: v1@11.683,16.638 11.683,8.828 14.097,6.413 17.335,6.413 19.431,8.509 19.816,8.509 ; C24.1@11.683,17.399 C23.1@11.683,18.986 ; v4(33.195,7.141) 33.167,7.112 33.167,6.84 32.74,6.413 22.606,6.413 20.511,8.509 19.816,8.509 ; v4(35.285,7.528) 35.285,7.538 34.707,8.116 23.634,8.116 22.177,9.573 20.881,9.573 19.816,8.509
  L1-SIGNAL/PWR w0.4: v4(26.098,4.953) 26.098,4.381 28.73,1.75 56.844,1.75 v1(57.594,2.5)
  L1-SIGNAL/PWR w0.8: C24.1@11.683,17.399 11.683,16.638 v1(11.684,16.637)
  L1-SIGNAL/PWR w1.2: J6.2@29.019,31.594 v1(29.874,31.594) ; Q9.2@64.842,2.405 65.167,2.405 v1(65.513,2.75)
  L2-PWR w0.4: 23.579,8.171 24.711,7.039 24.711,4.88 25.4,4.191 25.864,4.191 26.098,4.425 v4@26.098,4.939 ; 23.579,8.95 23.96,9.331 24.447,9.331 24.829,8.95 24.829,8.945 26.089,7.685 26.089,4.957 26.085,4.953 v4(26.098,4.953) ; v1(57.594,2.5) 57.676,2.5 58.226,1.95 64.686,1.95 65.486,2.75 v1(65.513,2.75)
  L2-PWR w0.8: 40.042,15.645 40.549,15.138 v1(41.495,14.192)
  L2-PWR w1.2: v1(11.684,16.637) 11.684,16.387 12.387,15.684 16.7,15.684 17.462,14.922 17.462,8.87 v1(18.233,8.099) 18.233,7.194 19.347,6.081 20.813,6.081 23.179,8.447 23.179,9.217 ; 23.28,9.217 23.423,9.36 23.423,14.942 24.126,15.645 40.042,15.645 41.056,15.645 ; v1(29.874,31.594) 29.874,30.705 31.559,29.019 36.009,29.019 38.93,26.098 ; v1(37.718,18.924) 38.481,19.688 38.481,25.142 39.184,25.845 38.93,26.098 ; 40.902,15.491 41.056,15.645 ; 41.722,16.311 41.056,15.645 ; 41.722,16.312 42.425,17.015 45.971,17.015 46.673,16.312 46.673,10.473 48.244,8.903 49.239,8.903 50.102,9.766 50.102,10.969 49.83,11.241 v1(49.83,12.273) 49.83,24.842 48.573,26.098 38.93,26.098
  L4-SIGNAL/PWR w0.25: U1.12@22.761,10.514 22.761,8.505 23.117,8.149 C54.1@23.117,8.099 ; v1(37.718,18.924) 38.325,18.924 38.339,18.91 IC3.28@38.339,18.528
  L4-SIGNAL/PWR w0.3: v4(33.195,7.141) 33.195,7.392 37.107,11.304 38.527,11.304 C33.1@38.669,11.445 ; v4(35.285,7.528) 37.472,9.716 39.716,9.716 40.891,10.891 C32.1@40.891,11.572
  L4-SIGNAL/PWR w0.5: v1(18.233,8.099) 18.233,6.913 18.898,6.248 20.246,6.248 21.009,7.011 22.116,7.011 22.567,7.463 22.567,7.499 23.117,8.049 C54.1@23.117,8.099 23.2,8.016 23.946,8.016 v6(24.025,7.937) ; v1(41.495,14.192) 41.549,14.192 41.62,14.263 41.887,14.263 C30.1@42.037,14.413
  L4-SIGNAL/PWR w0.8: C31.2@37.02,18.924 v1(37.718,18.924)
  L4-SIGNAL/PWR w1.2: v1(49.83,12.273) 53.644,12.273 57.087,8.831 57.087,7.048 60.325,3.81 64.453,3.81 v1(65.513,2.75)
AH: IC3.17 U1.41 | length 33.4
  L1-SIGNAL/PWR w0.2: v4(41.308,22.764) 41.35,22.721 41.795,22.721 44.139,20.377 44.139,20.097 v4(44.17,20.066)
  L4-SIGNAL/PWR w0.2: U1.41@24.761,21.891 24.761,27.872 25.59,28.702 30.226,28.702 31.925,27.003 31.925,25.903 31.958,25.871 31.958,23.668 33.297,22.329 37.226,22.329 37.467,22.571 41.115,22.571 v4(41.308,22.764) ; IC3.17@43.839,18.528 43.854,18.543 43.854,19.383 44.122,19.651 44.122,20.018 v4(44.17,20.066)
AL: IC3.18 U1.34 | length 35.2
  L1-SIGNAL/PWR w0.2: v4(23.356,28.774) 23.424,28.774 23.624,28.975 29.001,28.975 31.385,26.591 31.385,25.702 v4(31.432,25.654) ; v4(41.35,22.07) 41.398,22.022 41.732,22.022 43.177,20.577 43.424,20.33 43.424,20.028 v4(43.468,19.984)
  L4-SIGNAL/PWR w0.2: U1.34@21.261,21.891 21.261,26.659 23.356,28.754 v4(23.356,28.774) ; v4(31.432,25.654) 31.414,25.635 31.414,23.647 33.131,21.929 37.391,21.929 41.209,21.929 v4(41.35,22.07) ; IC3.18@43.339,18.528 43.339,19.787 43.468,19.916 v4(43.468,19.984)
BH: IC3.19 U1.42 | length 30.4
  L1-SIGNAL/PWR w0.2: v4(41.465,21.399) 41.497,21.399 42.776,20.121 42.776,19.947 v4(42.823,19.9)
  L4-SIGNAL/PWR w0.2: U1.42@25.261,21.891 25.261,27.484 25.971,28.194 29.527,28.194 30.878,26.843 30.878,23.409 32.887,21.399 v4(41.465,21.399) ; v4(42.823,19.9) 42.831,19.892 42.831,18.536 IC3.19@42.839,18.528
BL: IC3.20 U1.35 | length 33
  L1-SIGNAL/PWR w0.2: v4(23.876,28.384) 23.928,28.384 24.118,28.575 28.575,28.575 30.353,26.797 30.353,25.831 30.337,25.815 30.337,25.638 v4(30.29,25.59)
  L4-SIGNAL/PWR w0.2: U1.35@21.761,21.891 21.761,26.333 23.812,28.384 v4(23.876,28.384) ; v4(30.29,25.59) 30.29,23.431 32.829,20.892 41.319,20.892 42.178,20.033 42.178,19.529 42.324,19.383 42.324,18.543 IC3.20@42.339,18.528
  other v4: 42.178,19.976
CAN_N: C52.1 D4.3 IC5.6 J4.1 R29.1 | length 27.7
  L4-SIGNAL/PWR w0.2: IC5.6@44.036,6.668 44.668,6.668 45.053,6.283 45.689,6.283 45.895,6.076 46.288,6.076 46.405,6.193 46.405,6.276 46.708,6.58 R29.1@46.737,6.58 46.765,6.58 47.324,6.021 48.044,6.021 48.162,6.138 48.162,6.171 48.462,6.471 C52.1@48.512,6.471 48.562,6.471 48.862,6.171 48.862,6.138 48.979,6.021 49.391,6.021 49.956,6.586 50.857,6.586 51.309,7.038 D4.3@51.309,7.313 51.559,7.063 51.559,6.716 51.842,6.433 52.11,6.433 53.801,4.742 54.094,4.449 54.094,1.952 53.503,1.361 48.724,1.361 47.97,2.115 47.13,2.955 45.446,2.955 44.954,2.463 44.954,1.99 45.071,1.873 46.069,1.873 J4.1@46.101,1.905
CAN_P: C52.2 D3.3 IC5.7 J3.1 R29.2 | length 26.7
  L4-SIGNAL/PWR w0.2: J3.1@43.307,1.841 43.339,1.873 44.337,1.873 44.454,1.99 44.454,2.67 45.239,3.455 47.337,3.455 48.931,1.861 53.296,1.861 53.594,2.159 53.594,4.242 51.903,5.933 51.737,5.933 51.689,5.885 51.62,5.885 D3.3@51.37,5.635 ; IC5.7@44.036,5.398 44.668,5.398 45.053,5.783 45.402,5.783 45.609,5.576 46.288,5.576 46.405,5.459 46.405,5.376 46.708,5.073 R29.2@46.737,5.073 46.765,5.073 47.213,5.521 48.044,5.521 48.162,5.404 48.162,5.371 48.462,5.071 C52.2@48.512,5.071 48.562,5.071 48.862,5.371 48.862,5.404 48.979,5.521 49.598,5.521 50.164,6.086 50.918,6.086 D3.3@51.37,5.635 ; R29.2@46.517,4.883 R29.2@46.546,4.883 ; D3.3@51.37,5.635 D3.3@51.37,5.36 D3.3@51.37,5.635
CH: IC3.21 U1.43 | length 18.6
  L4-SIGNAL/PWR w0.2: U1.43@25.761,21.891 25.78,21.872 25.78,21.135 26.101,20.814 31.843,20.814 32.258,20.399 41.1,20.399 41.529,19.97 41.529,19.871 41.778,19.622 IC3.21@41.778,19.363 ; IC3.21@41.779,19.362 41.779,19.327 41.839,19.267 IC3.21@41.839,18.528
  other v4: 41.529,19.939
CL: IC3.22 U1.36 | length 21.4
  L4-SIGNAL/PWR w0.2: U1.36@22.261,21.891 22.28,21.872 22.28,21.135 23.001,20.414 31.677,20.414 32.217,19.874 v4(40.882,19.874) 40.882,19.843 41.324,19.402 41.324,18.543 IC3.22@41.339,18.528
DC_CAL: IC3.12 U1.11 | length 36.4
  L1-SIGNAL/PWR w0.2: v4(30.924,3.619) 30.924,4.763 32.062,5.9 39.084,5.9 42.505,9.321 42.505,10.778 45.648,13.921 v4(45.648,15.431)
  L2-PWR w0.2: v4(25.316,9.342) 30.877,3.781 30.877,3.667 v4(30.924,3.619)
  L4-SIGNAL/PWR w0.2: U1.11@23.261,10.514 23.28,10.495 23.28,9.759 23.716,9.322 25.296,9.322 v4(25.316,9.342) ; v4(45.648,15.431) 46.339,16.122 IC3.12@46.339,18.528
EN_GATE: IC3.16 U1.10 | length 42.4
  L1-SIGNAL/PWR w0.2: v4(34.353,2.857) v4(39.052,2.857)
  L2-PWR w0.2: v4(24.485,11.644) 24.485,11.075 32.703,2.857 v4(34.353,2.857) ; v4(39.052,2.857) 42.136,2.857 43.405,4.127 43.405,12.427 44.831,13.853 44.831,15.76 44.601,15.99 42.979,15.99 v4(42.938,15.949)
  L4-SIGNAL/PWR w0.2: U1.10@23.761,10.514 23.78,10.533 23.78,11.27 24.107,11.596 24.437,11.596 v4(24.485,11.644) ; v4(42.938,15.949) 44.323,17.334 44.323,18.513 IC3.16@44.339,18.528
GH_A: IC3.47 R5.1 | length 22.6
  L1-SIGNAL/PWR w0.4: v4@47.751,29.783 47.761,29.793 47.983,29.793 48.768,30.578 48.768,34.493 48.085,35.176 v4(48.085,35.19)
  L4-SIGNAL/PWR w0.25: IC3.47@47.339,25.943 47.345,25.949 47.345,27.111 47.354,27.121
  L4-SIGNAL/PWR w0.4: 47.354,27.121 47.354,27.631 47.738,28.014 v4(47.738,29.783) ; v4(48.085,35.19) 51.17,38.275 58.379,38.275 58.783,38.679 R5.1@58.783,38.925
GH_B: IC3.42 R6.1 | length 29.5
  L1-SIGNAL/PWR w0.4: v4(44.937,30) 44.937,30.904 46.897,32.864 v4(46.93,32.864)
  L4-SIGNAL/PWR w0.25: IC3.42@44.839,25.943 44.839,26.669 44.864,26.694 44.864,26.988 44.854,26.997
  L4-SIGNAL/PWR w0.4: 44.854,26.997 44.854,27.196 44.937,27.279 v4(44.937,30) ; v4(46.93,32.864) 46.944,32.864 47.085,33.005 53.601,33.005 57.276,29.329 60.829,29.329 61.678,28.48 61.678,27.409 61.443,27.174 60.178,27.174 59.463,26.459 59.463,25.717 R6.1@59.082,25.336
GH_C: IC3.37 R7.1 | length 35.8
  L1-SIGNAL/PWR w0.4: v4(42.291,28.067) 42.301,28.057 42.301,26.827 42.934,26.194 48.101,26.194 50.102,24.194 50.102,21.899 49.867,21.665 48.828,21.665 v4@48.819,21.655 ; v4(60.102,15.811) 60.102,17.122 60.308,17.329 v4(60.308,17.396)
  L4-SIGNAL/PWR w0.25: IC3.37@42.339,25.943 42.345,25.949 42.345,27.013 42.354,27.022
  L4-SIGNAL/PWR w0.4: v4(42.291,28.067) 42.354,28.004 42.354,27.401 42.354,27.022 ; v4(48.805,21.655) 48.813,21.663 54.824,21.663 59.091,17.396 v4(60.308,17.396) ; R7.1@58.529,11.557 58.529,14.238 v4(60.102,15.811)
GL_A: IC3.45 R13.1 | length 38.7
  L1-SIGNAL/PWR w0.4: v4(60.499,28.704) 60.499,31.575 60.579,31.655 v4(60.579,31.668)
  L4-SIGNAL/PWR w0.25: IC3.45@46.339,25.943 46.345,25.937 46.345,25.013 46.661,24.696 52.065,24.696 52.387,25.019
  L4-SIGNAL/PWR w0.4: 52.387,25.019 56.072,28.704 v4(60.499,28.704) ; v4(60.579,31.668) 60.579,31.682 60.478,31.783 60.478,32.568 61.184,33.274 67.082,33.274 67.782,33.974 71.675,33.974 72.196,33.453 72.196,30.206 72.431,29.972 74.086,29.972 R13.1@74.168,29.89
GL_B: IC3.40 R14.1 | length 38.3
  L2-PWR w0.4: v4(44.589,24.719) 47.676,24.719 v4(48.699,23.696)
  L4-SIGNAL/PWR w0.2: IC3.40@43.839,25.943 43.854,25.928 43.854,25.088 44.157,24.786 44.164,24.786 44.183,24.767 44.541,24.767 v4(44.589,24.719)
  L4-SIGNAL/PWR w0.4: v4(48.699,23.696) 56.083,23.696 60.396,19.383 66.653,19.383 67.846,20.575 71.727,20.575 72.179,20.124 72.179,16.641 72.63,16.19 74.501,16.19 R14.1@74.549,16.238
GL_C: IC3.35 R15.1 | length 63.4
  L1-SIGNAL/PWR w0.4: v4(41.402,4.445) 41.402,4.44 41.148,4.186 41.148,3.166 41.903,2.411 v4(55.317,2.411) ; v4@41.42,24.556 40.069,23.205 40.069,19.799 41.974,17.894 41.974,15.91 v4@42.841,15.043
  L2-PWR w0.4: v4(41.402,4.445) 41.404,4.445 41.974,5.015 41.974,13.456 42.295,13.778 42.295,14.462 42.851,15.018 v4(42.851,15.032)
  L4-SIGNAL/PWR w0.25: IC3.35@41.339,25.943 41.345,25.937 41.345,24.976 41.358,24.962
  L4-SIGNAL/PWR w0.4: 41.358,24.962 41.358,24.943 41.415,24.886 41.415,24.566 v4(41.424,24.556) ; v4(55.317,2.411) 55.317,1.948 56.115,1.15 74.44,1.15 76.323,3.032 76.323,3.597 R15.1@76.726,4
GND: 3V3.4 -.1 C1.1 C2.1 C4.2 C5.1 C6.1 C7.1 C8.2 C9.1 C16.1 C19.1 C21.1 C22.1 C25.1 C26.1 C27.1 C34.1 C35.1 C36.2 C37.2 C38.2 C39.2 C41.1 C42.1 C43.1 C44.1 C45.1 C46.1 C47.1 C48.1 C49.1 C50.1 C51.2 C55.1 C56.1 C57.1 C58.2 D1.2 D2.1 D3.1 D4.2 Dz1.2 IC1.7 IC1.9 IC2.2 IC3.55 IC3.57 IC4.2 IC5.2 IC5.8 J5.1 J6.1 J7.2 J10.2 J11.2 pad.1@4.953,14.732 Q6.1 Q6.2 Q6.3 R8.1 R11.2 R12.1 R20.1 R21.1 R25.1 R28.2 R31.1 R34.1 S1.1 S2.1 S3.1 S4.1 SW1.2 U1.18 X1.2 X1.4 | length 73.5
  L1-SIGNAL/PWR w0.4: v1(10.385,39.92) 10.438,39.974 11.25,39.974 IC4.2@11.275,39.999
  L1-SIGNAL/PWR w0.5: v1(10.54,33.783) C41.1@10.54,34.544 ; v1(13.589,11.747) 13.621,11.779 14.635,11.779 C27.1@14.667,11.811 ; v1(13.621,14.534) 13.675,14.534 13.863,14.722 14.581,14.722 14.731,14.872 C25.1@14.731,14.922 ; v1(13.652,10.351) 13.684,10.319 14.635,10.319 C42.1@14.667,10.287 ; v1(13.652,13.271) C26.1@14.667,13.271 ; IC2.2@17.067,20.349 v1(17.623,20.349) ; v11(18.92,15.811) C22.1@18.92,16.532 ; v1@24.67,19.399 v1(24.721,19.399) IC1.7@26.048,19.399 ; R11.2@27.977,24.272 27.977,24.244 28.13,24.09 28.69,24.09 29.045,23.736 29.045,23.406 v1(29.083,23.368)
  L1-SIGNAL/PWR w0.8: R8.1@32.91,24.277 v1(32.91,25.099) ; v11(38.86,18.329) 38.927,18.262 C6.1@38.927,16.891 ; C7.1@38.927,15.367 38.927,15.317 39.788,14.456 v11(39.788,14.341)
  L1-SIGNAL/PWR w1: C21.1@11.684,32.75 11.764,32.67 v10(12.731,32.67) ; R25.1@13.678,43.54 v1(14.401,43.54) ; v1(13.843,33.337) 13.857,33.352 13.857,34.126 13.882,34.151 Dz1.2@13.932,34.151 ; C9.1@22.86,18.473 22.981,18.595 v1(22.981,19.596) ; C4.2@34.608,23.754 34.614,23.747 v11(35.588,23.747)
  L1-SIGNAL/PWR w1.2: C8.2@25.4,32.076 25.4,31.819 25.625,31.594 J6.1@27.495,31.594
  L1-SIGNAL/PWR w2.5: D2.1@2.41,22.543 2.51,22.443 2.51,20.033
  L4-SIGNAL/PWR w0.2: J11.2@61.531,15.773 61.562,15.804 62.414,15.804 62.955,16.345 v1(62.955,16.491) v1@62.955,16.637
  L4-SIGNAL/PWR w0.25: v9(17.462,11.896) 17.549,11.982 17.549,12.474 18.03,12.955 18.801,12.955 U1.18@18.811,12.964 ; IC3.55@51.339,25.943 51.345,25.949 51.345,27.142 v6(51.368,27.165)
  L4-SIGNAL/PWR w0.3: S1.1@1.1,41.661 1.261,41.5 S1.1@3.5,41.5 S1.1@3.5,44 ; S4.1@79,41.5 79,40.464 S4.1@79.732,39.732 80.464,39 S4.1@81.5,39 82.536,39 S4.1@83.268,39.732 ; S4.1@81.5,41.5 81.8,41.8 83.439,41.8 83.739,41.5 83.739,42.796 S4.1@83.268,43.268
  L4-SIGNAL/PWR w0.4: J10.2@62.323,29.531 63.483,29.531
  L4-SIGNAL/PWR w0.5: v1(8.572,1.46) 8.587,1.475 SW1.2@9.779,1.475 ; C51.2@12.319,2.475 v1(13.055,2.475) v1@13.08,2.475 ; R34.1@20.121,4.255 v6(20.121,5.135) ; C58.2@21.645,4.761 21.757,4.873 22.379,4.873 v6(22.417,4.911) ; v6(29.795,6.034) C57.1@30.535,6.034 ; R31.1@32.078,16.539 v6(32.078,17.366) ; C44.1@32.085,10.683 v6(32.91,10.683) ; v6(34.988,3.302) C49.1@34.988,4.063 ; v6(36.586,3.39) C48.1@36.586,4.101 ; J5.1@40.703,1.841 v6(40.703,2.73) ; v6(42.799,4.128) IC5.8@44.036,4.128 ; C16.1@45.529,13.207 v6(45.979,13.656) v6@46.033,13.656 ; C1.1@51.446,29.783 v6(51.446,30.429) ; C2.1@53.054,29.783 v6(53.054,30.512) ; J7.2@67.577,3.492 67.681,3.597 68.447,3.597 v1(68.485,3.635)
  L4-SIGNAL/PWR w0.6: v6(29.719,7.742) C43.1@29.719,8.509 ; IC5.2@38.895,5.398 v6(39.997,5.398) ; C50.1@47.753,7.937 v6(48.511,7.937) ; v6(51.689,3.36) D3.1@52.32,3.36 ; v6(52.259,8.421) D4.2@52.259,9.313
  L4-SIGNAL/PWR w0.8: v9(15.621,20.349) 15.627,20.343 C55.1@16.757,20.343 ; v6(51.353,14.741) R12.1@51.943,14.741
  L4-SIGNAL/PWR w1: C47.1@15.62,13.272 15.62,13.712 v6(16.068,14.16) ; v6(15.94,15.966) R28.2@16.764,15.966 ; C46.1@18.542,22.591 v6(18.542,23.241) ; v12(24.167,2.794) X1.4@24.167,4.007 ; C56.1@26.289,26.036 v6(26.289,26.816) ; C45.1@27.812,26.012 v6(27.812,26.843) ; v12(28.267,5.457) X1.2@28.267,6.407 ; v12(33.528,35.877) C5.1@33.528,37.354 ; C34.1@34.138,24.168 34.227,24.08 v6(34.227,23.177)
  other v1: 23.241,1.82 24.511,1.82 77.851,1.82 68.485,2.636 69.485,2.636 70.485,2.636 10.961,3.553 8.89,3.683 68.485,4.635 69.485,4.635 70.485,4.635 6.731,5.63 77,6.3 1.651,6.9 5.461,6.9 6.731,6.9 8.001,6.9 9.271,6.9 10.541,6.9 11.811,6.9 1.651,8.17 2.921,8.17 4.191,8.17 5.461,8.17 6.731,8.17 8.001,8.17 9.271,8.17 10.541,8.17 1.651,9.44 2.921,9.44 4.191,9.44 5.461,9.44 6.731,9.44 8.001,9.44 9.271,9.44 10.541,9.44 1.651,10.71 2.921,10.71 4.191,10.71 5.461,10.71 6.731,10.71 8.001,10.71 9.271,10.71 62.865,15.303 64.008,15.303 65.278,15.303 66.548,15.303 64.008,16.543 65.278,16.543 66.548,16.543 62.865,17.843 64.008,17.843 65.278,17.843 66.548,17.843 1.651,18.33 8.001,18.33 4.191,19.6 5.461,19.6 6.731,19.6 8.001,19.6 9.271,19.6 12.505,21.7 29.591,22.14 13.081,23.41 14.351,23.41 15.621,23.41 1.651,24.68 2.921,24.68 34.183,26.289 76.08,27.882 75.311,28.62 64.564,29.148 65.834,29.148 67.104,29.148 21.971,29.76 65.151,29.76 66.421,29.76 64.564,30.448 65.834,30.448 67.104,30.448 21.971,31.03 64.564,31.688 65.834,31.688 67.104,31.688 27.051,32.3 45.033,33.173 27.051,33.57 28.321,33.57 29.591,33.57 30.861,33.57 32.131,33.57 37.211,33.57 15.745,34.227 38.281,34.659 1.651,34.84 2.921,34.84 4.191,34.84 5.461,34.84 6.731,34.84 23.241,34.84 24.511,34.84 1.651,36.11 2.921,36.11 4.191,36.11 5.461,36.11 6.731,36.11 23.241,36.11 24.511,36.11 1.651,37.38 2.921,37.38 4.191,37.38 5.461,37.38 6.731,37.38 23.241,37.38 82.931,37.38 6.731,38.65 6.731,39.92 10.918,42.037 77.851,42.46
  other v2: 71.945,2.095 73.343,2.095 44.337,4.186 47.631,4.171 2.413,12.208 3.413,12.208 4.413,12.208 5.413,12.208 6.413,12.208 7.413,12.208 2.413,13.209 3.413,13.209 4.413,13.209 5.413,13.209 6.413,13.209 7.413,13.209 2.413,14.209 3.413,14.209 4.413,14.209 5.413,14.209 6.413,14.209 7.413,14.209 2.413,15.208 3.413,15.208 4.413,15.208 5.413,15.208 6.413,15.208 7.413,15.208 72.63,15.329 76.2,16.002 2.413,16.208 3.413,16.208 4.413,16.208 5.413,16.208 6.413,16.208 7.413,16.208 2.413,17.209 3.413,17.209 4.413,17.209 5.413,17.209 6.413,17.209 7.413,17.209 83.185,17.97 76.581,18.161 21.761,18.59 47.576,20.141 46.411,20.289 45.231,20.346 47.213,21.056 45.661,21.388 46.582,21.892 44.075,22.316 45.265,22.343 42.799,22.669
  other v3: 69.485,3.635 70.485,3.635 68.485,5.636 69.485,5.636 70.485,5.636 63.294,29.148 63.294,30.448 63.313,31.688 44.196,38.179 44.996,38.179 45.796,38.179 46.596,38.179 47.396,38.179 44.196,39.179 44.996,39.179 45.796,39.179 46.596,39.179 47.396,39.179
  other v4: 72.231,29.088
  other v6: 55.037,3.492 56.115,3.746 52.881,7.038 54.094,7.515
  other v7: 47.707,5.548 44.065,5.874 44.939,5.874 45.839,5.874 46.739,5.874 47.673,6.521 44.065,6.874 44.939,6.874 45.839,6.874 46.739,6.874 18.898,10.96 20.053,11.752 18.936,12.022 19.431,13.081 20.444,13.376 18.986,13.97 19.941,13.964 43.961,27.368 44.925,27.368 45.825,27.368 46.725,27.368 47.625,27.368 43.961,28.369 44.925,28.369 45.825,28.369 46.725,28.369 47.625,28.369
  other v9: 59.16,21.803 59.178,23.509 57.006,23.956 54.847,24.842 57.432,25.336 56.111,26.166 57.26,27.174 58.356,27.174
  other v10: 1.968,19.748 3.111,19.748 25.527,30.734 23.939,30.924 23.876,32.575 25.625,32.575 23.876,33.972 25.625,33.972
  other v11: 27.977,19.399 29.341,19.399 27.977,20.814 29.341,20.814
  other v13: 44.323,21.145
JTCK/SWCLK: 3V3.3 R34.2 U1.49 | length 25
  L4-SIGNAL/PWR w0.2: 3V3.3@19.494,2.286 18.605,3.175 18.605,4.246 R34.2@18.614,4.255 18.614,4.283 17.209,5.689 17.209,8.575 28.597,19.964 U1.49@30.211,19.964
JTMS/SWDIO: 3V3.2 R32.1 U1.46 | length 27.4
  L2-PWR w0.2: v4(23.971,19.596) 26.098,21.723 v4(26.098,23.368)
  L4-SIGNAL/PWR w0.2: R32.1@16.692,4.289 16.692,3.122 16.702,3.112 16.702,2.539 3V3.2@16.954,2.286 ; R32.1@16.692,4.318 16.473,4.537 16.473,8.535 23.971,16.033 v4(23.971,19.596) ; v4(26.098,23.368) 26.52,23.368 27.242,22.646 27.242,21.91 U1.46@27.261,21.891
NetC3_1: C3.1 D1.1 IC1.8 L2.1
NetC3_2: C3.2 IC1.1 | length 4
  L1-SIGNAL/PWR w0.5: C3.2@29.341,16.097 31.196,16.097 31.488,16.39 IC1.1@31.488,18.129